# Altium PCB InfraredEmitter.PcbDoc
Units mil, origin at the board's own origin, x right, y up, seen from the top; angles counter-clockwise.
Board outline 1540 x 1315 mil, 2 copper layers (Top Layer, Bottom Layer), stack 21 mil thick; 22 components, 17 nets, 92 pads, 22 vias.
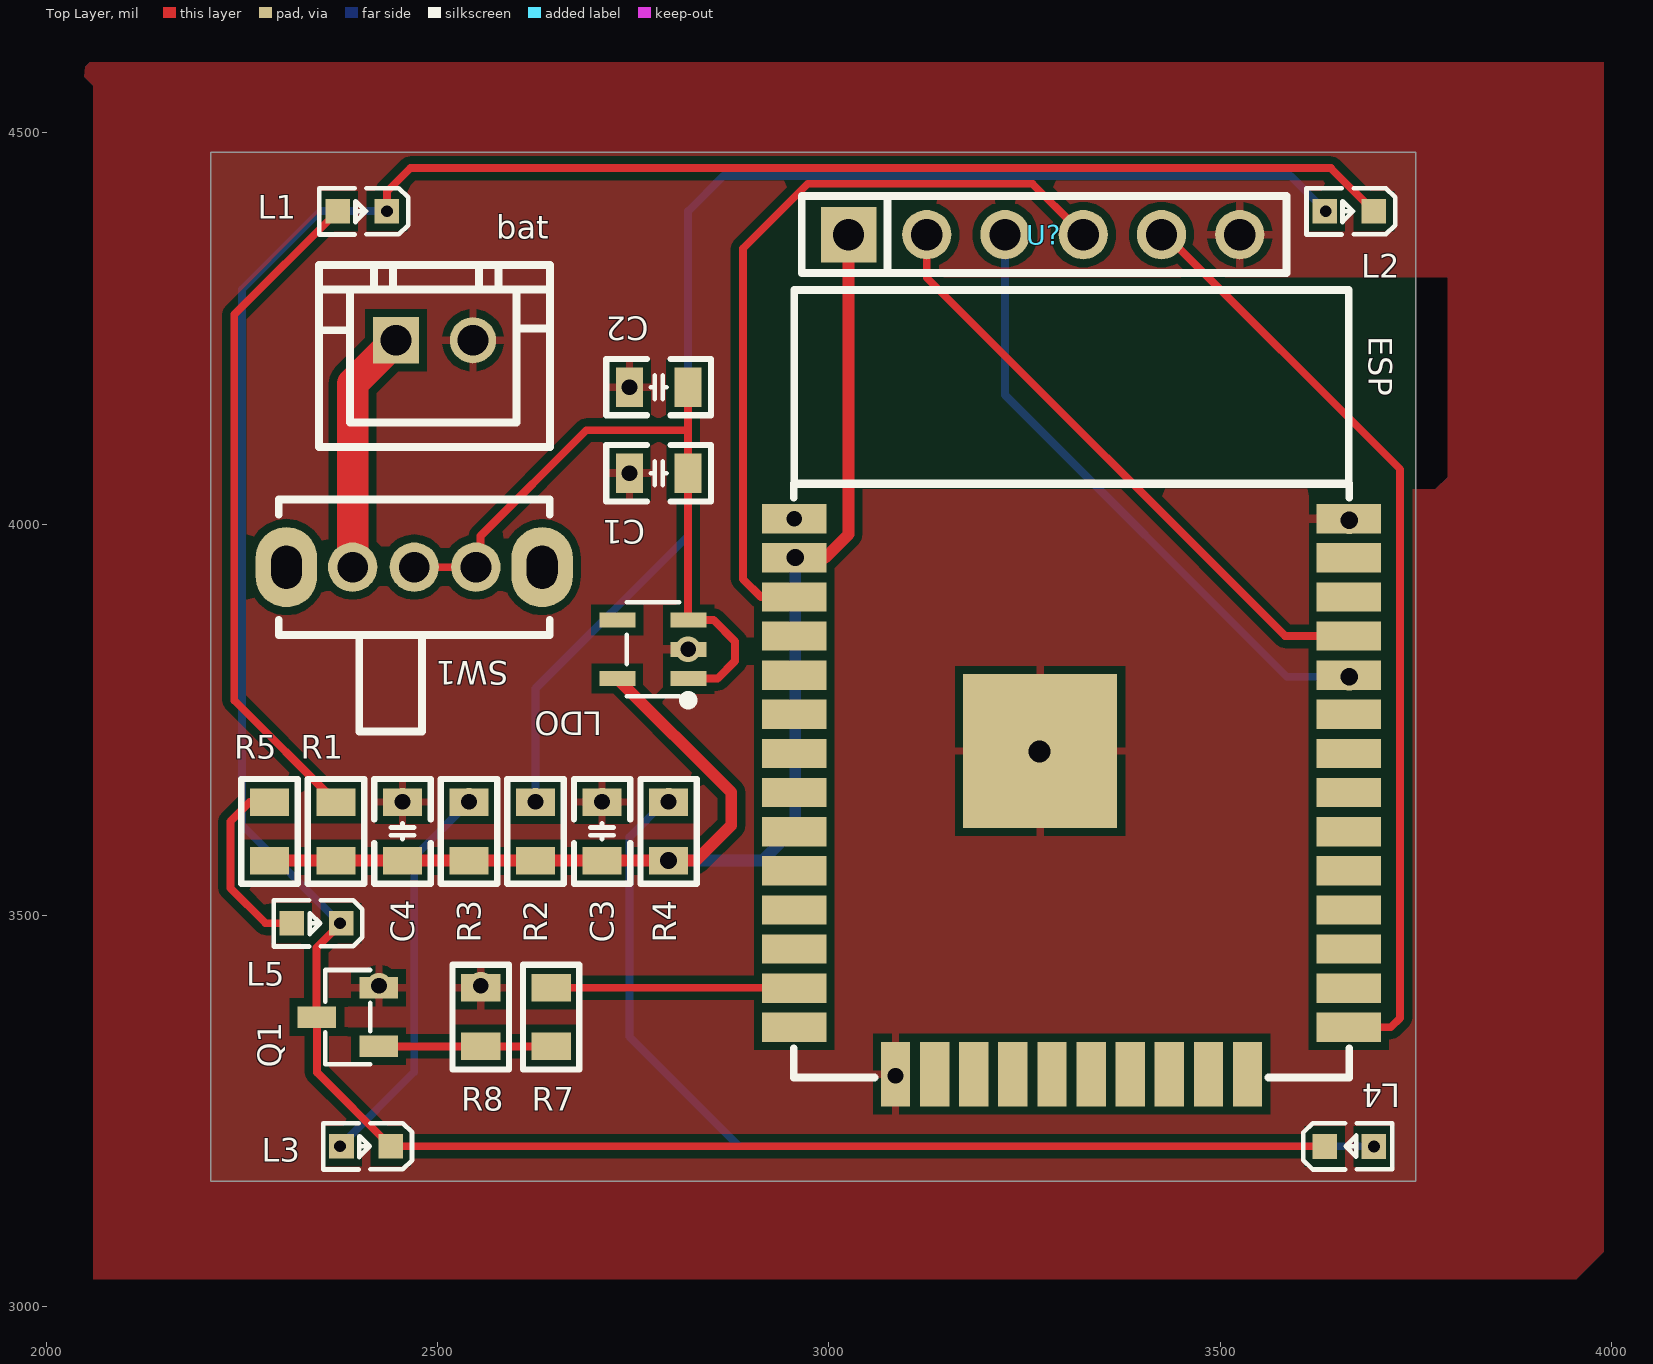
[diagram p0: Top Layer view]
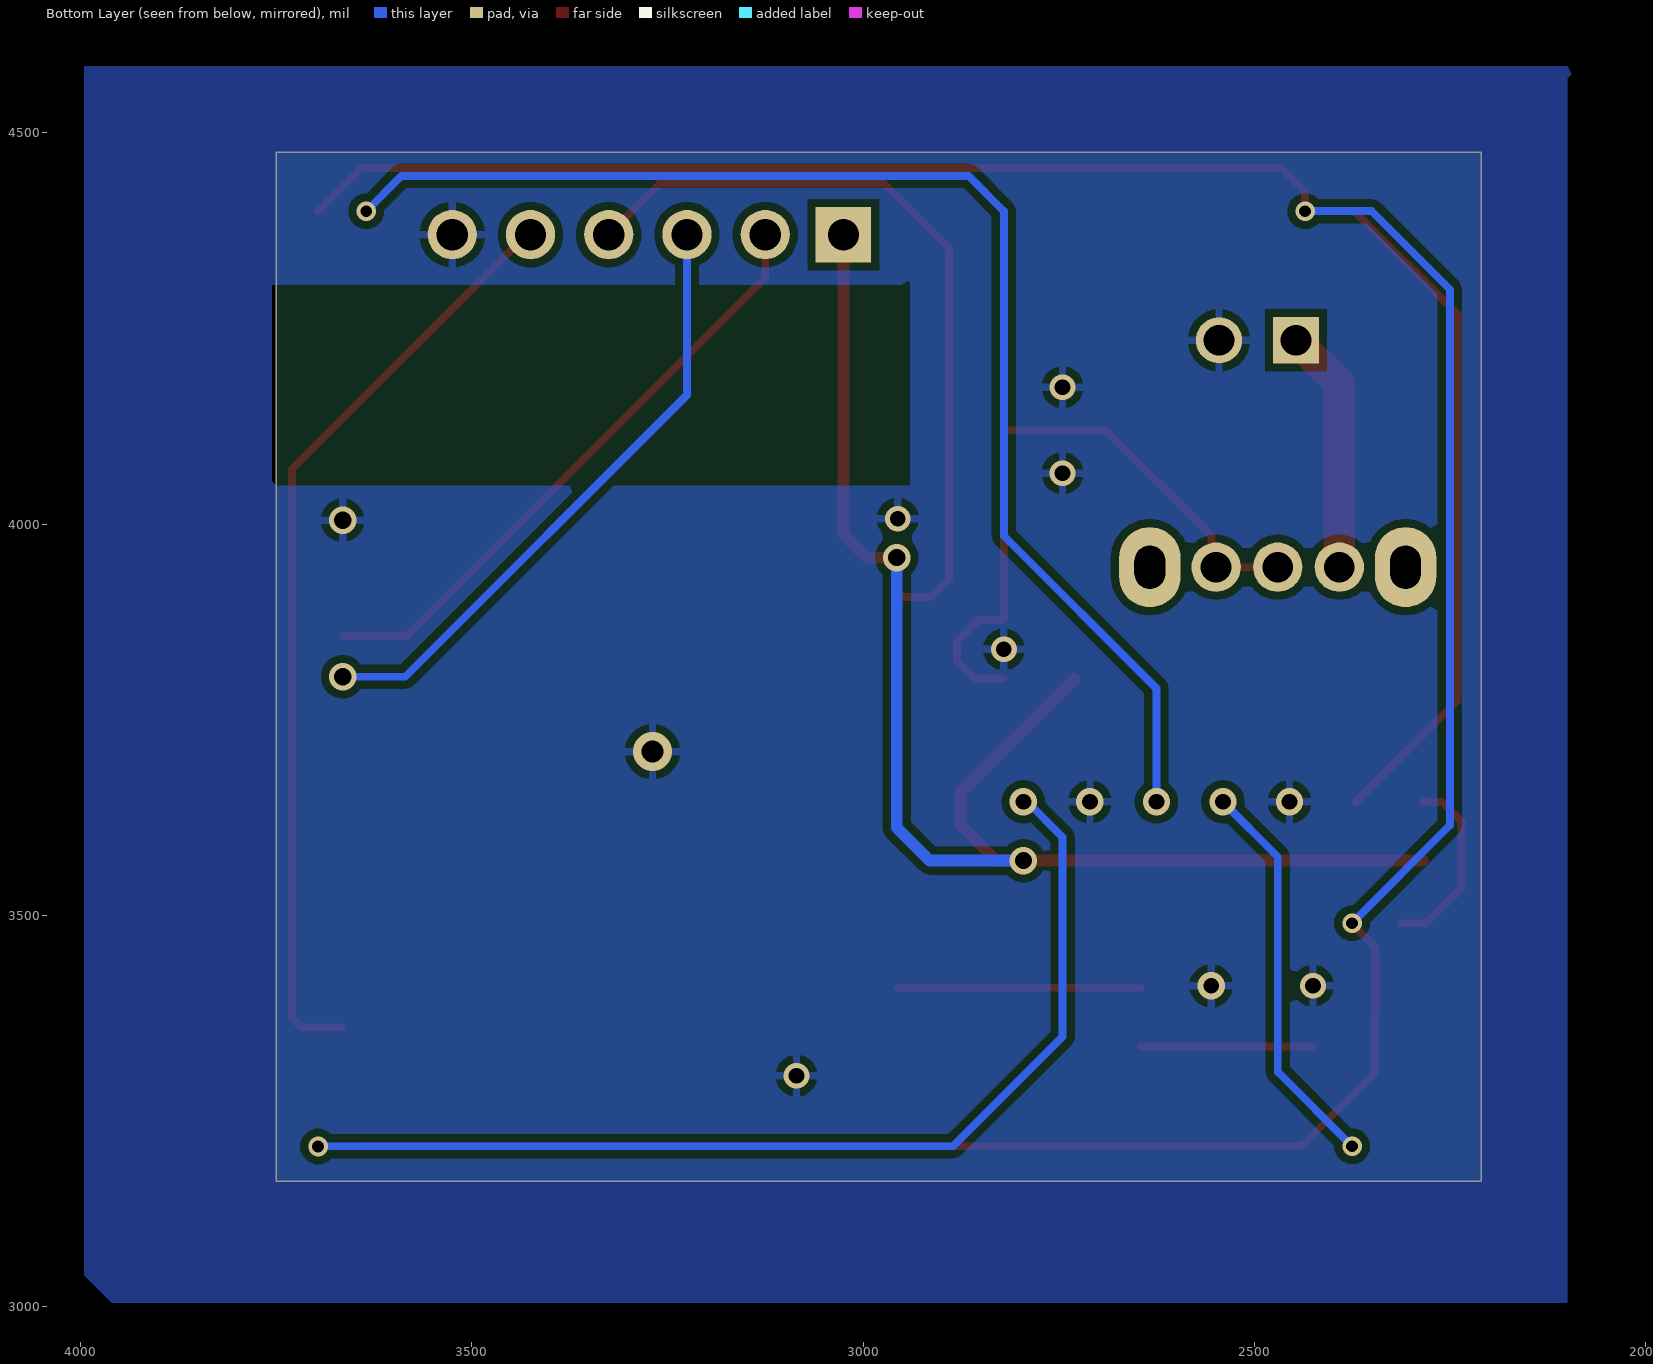
[diagram p1: Bottom Layer view, seen from below]
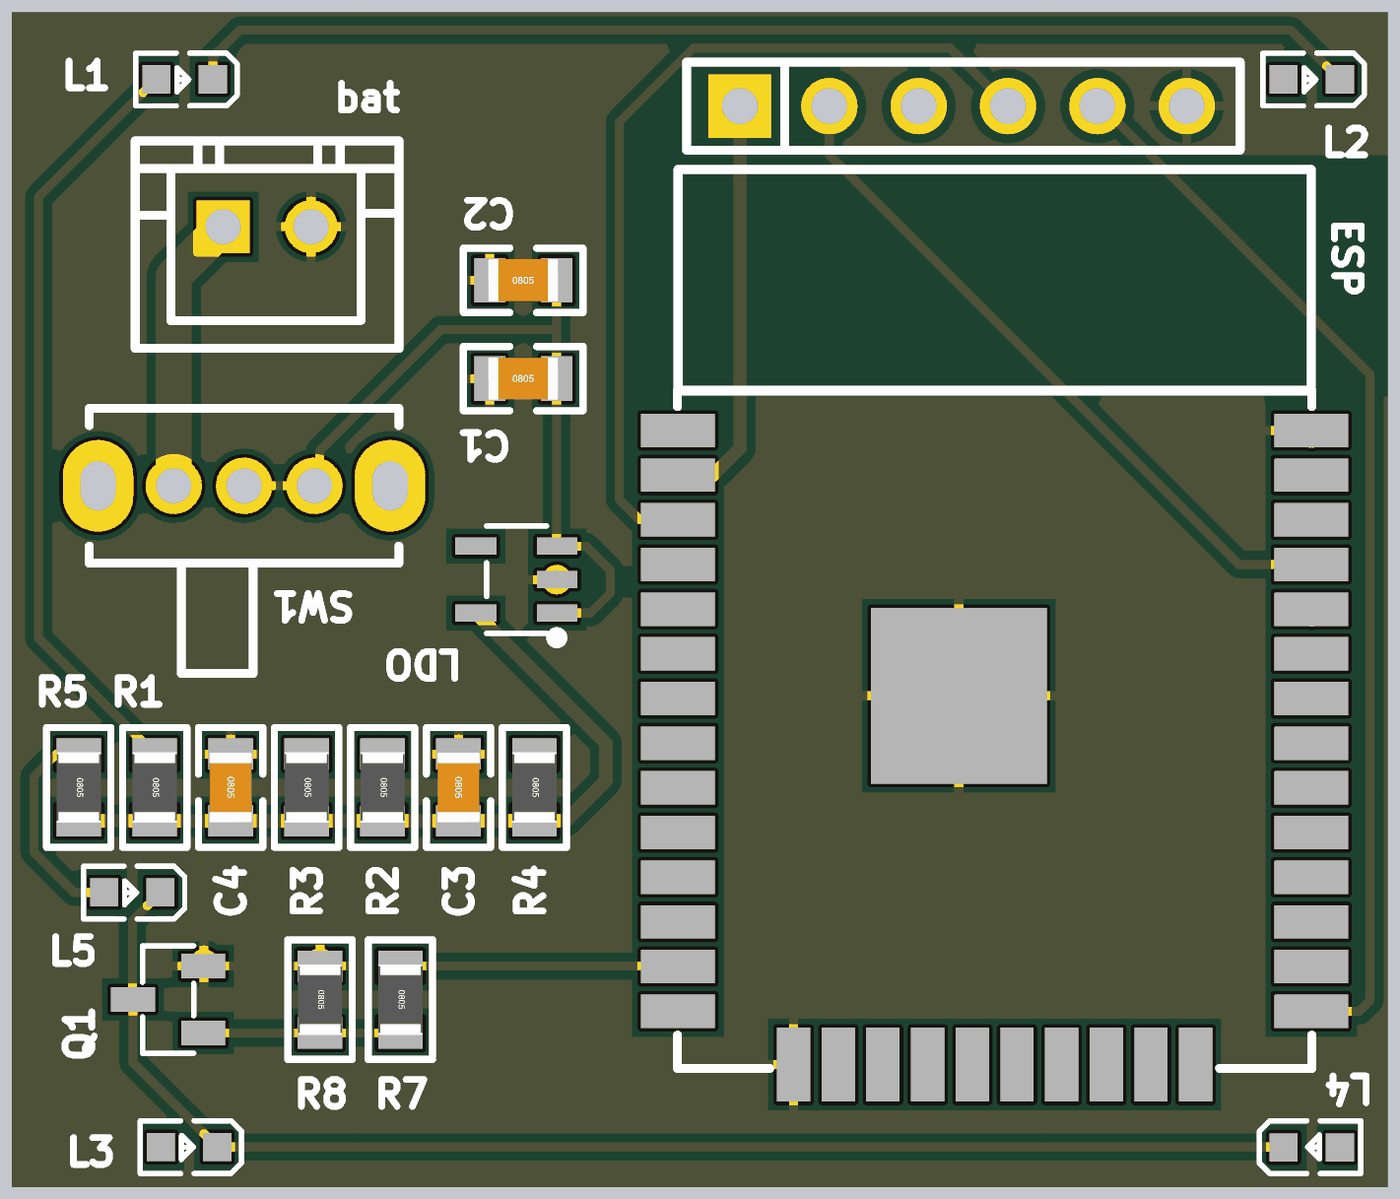
[diagram p2: 3D render of the assembled board from above, using the file's embedded part models]

## Layer stack, top to bottom
Top Solder: solder mask 0.4, Solder Resist, Dk 3.5
Top Layer: signal copper 1.4
Dielectric 2: prepreg 2.8, PP-006, Dk 4.1
Dielectric 1: dielectric 12.6, FR-4, Dk 4.8
Dielectric 3: prepreg 2.8, PP-006, Dk 4.1
Bottom Layer: signal copper 1.4
Bottom Solder: solder mask 0.4, Solder Resist, Dk 3.5

## Board outline
2210,3160 2210,4475 3750,4475 3750,3160

## Design rules (kind name [scope] priority, off if disabled: settings)
Clearance [All] p1: gap=10 ignorepadtopadclearanceinfootprint=FALSE
PolygonConnect [All] p1: connectstyle=Relief reliefconductorwidth=10 reliefentries=4 polygonreliefangle="90 Angle" airgapwidth=10
RoutingVias [All] p1: holewidth=28 width=50 viastyle="Through Hole" minholewidth=28 minwidth=50 maxholewidth=28 maxwidth=50
SolderMaskExpansion [All] p1: expansion=4 istentingtop=FALSE
SupplyNets "Schematic Supply Nets" [InNet('GND')] p1: voltage=0.000
Width [All] p1: maxlimit=50 minlimit=10 preferedwidth=10 minimp=50.000000 maximp=50.000000 favimp=50.000000
30 further rules are at their usual default settings.

## Components (designator, comment, footprint, x,y, rotation, side; value= is the part's Value field where it differs from the comment)
bat "HX-XH2.54-2PZZ" CONN-TH_2P-P2.50_HX-2.54MM-2P-ZZ-MS 2495.79,4235 r0 top
C1 "0.1u" "C 0805_L" 2782.4,4065 r0 top
C2 "0.1u" "C 0805_L" 2782.4,4175 r0 top
C3 "0.1u" "C 0805_L" 2710,3607.4 r270 top
C4 "0.1u" "C 0805_L" 2455,3607.4 r270 top
ESP "ESP32-WROOM-32D-N4" WIFIM-SMD_39P-L25.5-W18.0-P1.27-BL 3310.03,3652.05 r270 top
L1 "XYC-IRP0603AC-A2" LED0603-RD 2403.53,4400 r180 top (schematic designator Red1)
L2 "XYC-IRP0603AC-A2" LED0603-RD 3665,4400 r180 top (schematic designator Red2)
L3 "XYC-IRP0603AC-A2" LED0603-RD 2408.53,3205 r180 top (schematic designator Red3)
L4 "XYC-IRP0603AC-A2" LED0603-RD 3665,3204.58 r0 top (schematic designator Red4)
L5 "XYC-IRP0603AC-A2" LED0603-RD 2345,3490 r180 top (schematic designator Red5)
LDO "ME6211C33M5G-N" SOT-23-5_L3.0-W1.7-P0.95-LS2.8-BL 2775,3840 r90 top
Q1 "S8050" SOT-23-3_L2.9-W1.3-P1.90-LS2.4-BR 2385,3370 r0 top
R1 "100R" "R 0805_L" 2370,3607.4 r270 top
R2 "100R" "R 0805_L" 2625,3607.4 r270 top
R3 "100R" "R 0805_L" 2540,3607.4 r270 top
R4 "100R" "R 0805_L" 2795,3607.4 r270 top
R5 "100R" "R 0805_L" 2285,3607.4 r270 top
R7 "4.7k" "R 0805_L" 2645,3370 r270 top
R8 "10K" "R 0805_L" 2555,3370 r270 top
SW1 "SK12D07VG3" SW-TH_SK12D07VG3 2470,3945 r0 top
U? "Comment" HDR-TH_6P-P2.54-V-F 3275,4370 r0 top

## Footprints (in the part's own frame and the unit in brackets; to place one, negate y for a bottom-side part, rotate by r counter-clockwise, add the part's x,y. Pads: shape width x height; smd on the part's side, far side on the other; paste and mask are expansions set on the pad)
"C 0805_L" [mil] "无极性贴片电容                                        淘宝ID:黄晶宝石"
  rect 35x50 smd: 1(-37.4,0) 2(37.4,0)
  silkscreen extent -67,-36 67,36, body extent -39,-24 39,24, height 20
CONN-TH_2P-P2.50_HX-2.54MM-2P-ZZ-MS [mm]
  rect 1.5x1.5 hole 1: 1(-1.25,0)
  round 1.5 hole 1: 2(1.25,0)
  silkscreen extent -3.75,-3.46 3.75,2.44
HDR-TH_6P-P2.54-V-F [mm]
  rect 1.8x1.8 hole 1.02 paste-2539.97 mask+0: 1(-6.35,0)
  round 1.6 hole 1.02 paste-2539.97 mask+0: 2(-3.81,0) 3(-1.27,0) 4(1.27,0) 5(3.81,0) 6(6.35,0)
  silkscreen extent -7.87,-1.25 7.87,1.25
LED0603-RD [mm]
  rect 0.8x0.8 smd: 1(-0.799,0) 2(0.799,0)
  silkscreen extent -1.49,-0.75 1.39,0.76
"R 0805_L" [mil] "1/8W贴片电阻"
  rect 35x50 smd: 1(-37.4,0) 2(37.4,0)
  silkscreen extent -67,-36 67,36, body extent -39,-25 39,25, height 20
SOT-23-3_L2.9-W1.3-P1.90-LS2.4-BR [mm]
  rect 1.25x0.7 smd: 1(1,-0.95) 2(1,0.95) 3(-1,0)
  silkscreen extent -0.73,-1.53 0.73,1.53
SOT-23-5_L3.0-W1.7-P0.95-LS2.8-BL [mm]
  rect 0.49x1.157 smd: 1(-0.95,-1.154) 2(0,-1.154) 3(0.95,-1.154)
  rect 0.49x1.175 smd: 4(0.95,1.154) 5(-0.95,1.154)
  silkscreen extent -1.8,-1.29 1.53,0.85
SW-TH_SK12D07VG3 [mm]
  round 1.6 hole 1: 1(-2,0) 2(0,0) 3(2,0)
  oval 2x2.6 hole 1 slot 1.4 at 90 deg: 4(4.15,0) 5(-4.15,0)
  silkscreen extent -4.4,-5.33 4.4,2.2
WIFIM-SMD_39P-L25.5-W18.0-P1.27-BL [mm]
  rect 0.95x2.1 smd: 1(-9.015,-9) 2(-7.745,-9) 3(-6.475,-9) 4(-5.205,-9) 5(-3.935,-9) 6(-2.665,-9) 7(-1.395,-9) 8(-0.125,-9) 9(1.145,-9) 10(2.415,-9) 11(3.685,-9) 12(4.955,-9) 13(6.225,-9) 14(7.495,-9) 25(7.495,9) 26(6.225,9) 27(4.955,9) 28(3.685,9) 29(2.415,9) 30(1.145,9) 31(-0.125,9) 32(-1.395,9) 33(-2.665,9) 34(-3.935,9) 35(-5.205,9) 36(-6.475,9) 37(-7.745,9) 38(-9.015,9)
  rect 2.1x0.95 smd: 15(9.015,-5.715) 16(9.015,-4.445) 17(9.015,-3.175) 18(9.015,-1.905) 19(9.015,-0.635) 20(9.015,0.635) 21(9.015,1.905) 22(9.015,3.175) 23(9.015,4.445) 24(9.015,5.715)
  rect 5x5 smd: 39(-1.472,-1.017)
  silkscreen extent -16.44,-9.02 9.12,9.02

## Part data
bat: Color=白色, Current Rating=3A, Flame Retardant Rating=UL94V-0, JLCPCB Part Class="Extended Part", LCSC Part Name="1x2P 间距:2.5mm 直插 系列:XH", Manufacturer=hanxia(韩下), Operating Temperature=-25℃~+85℃, Voltage Rating=250V, Add into BOM=yes, Contact Material=黄铜, Contact Plating=锡, Convert to PCB=yes, Datasheet=https://item.szlcsc.com/datasheet/HX-XH2.54-2PZZ/44326932.html, Device=HX-XH2.54-2PZZ, Manufacturer Part=HX-XH2.54-2PZZ, Mounting Type=直插, Number of Pins=2P, Number of PINs Per Row=2, Number of Rows=1, Pins Structure=1x2P, Pitch=2.54mm, Plastic Material=PA66, Reference Series=XH, Row Spacing=-, Supplier=LCSC, Supplier Footprint=插件,P=2.5mm, Supplier Part=C42391660, Symbol=HX-XH2.54-2PZZ
C1 C2 C3 C4: library part C, "贴片电容", BOM名称=无极性贴片电容, 唯一出售店铺网址=https://shop463601444.taobao.com, 淘宝ID="封装库来自淘宝 ID：黄晶宝石", 联系售后，技术支持=https://shop463601444.taobao.com
ESP: JLCPCB Part Class="Extended Part", LCSC Part Name="通用型Wi-Fi+BT+BLE MCU模组", Manufacturer=ESPRESSIF(乐鑫), Add into BOM=yes, Convert to PCB=yes, Datasheet=https://atta.szlcsc.com/upload/public/pdf/source/20191225/C473012_1E74417EE995DBCF17C94BD318A37DAB.pdf, Device=ESP32-WROOM-32D-N4, Manufacturer Part=ESP32-WROOM-32D-N4, Supplier=LCSC, Supplier Footprint=SMD,18x25.5mm, Supplier Part=C473012, Symbol=ESP32-WROOM-32D
L1 L2 L3 L4 L5: Current - DC Forward(If)=50mA, JLCPCB Part Class="Extended Part", LCSC Part Name=0603贴片850nm红外发射管, Manufacturer=NEWOPTO(鑫永诚光电), Operating Temperature=-30℃~+85℃, Pd - Power Dissipation=80mW, Voltage - DC Reverse(Vr)=5V, Voltage - Forward(Vf)=1.3V~1.6V, Add into BOM=yes, Convert to PCB=yes, Datasheet=https://item.szlcsc.com/datasheet/XYC-IRP0603AC-A2/7022073.html, Device=XYC-IRP0603AC-A2, Manufacturer Part=XYC-IRP0603AC-A2, Radiant Intensity=2.25mW/sr, Supplier=LCSC, Supplier Footprint=0603, Supplier Part=C6081304, Symbol=XYC-IRP0603AC-A2, Viewing Angle=140°, Wavelength=850nm
LDO: JLCPCB Part Class="Extended Part", LCSC Part Name="输入6V 输出3.3V 500mA", Manufacturer=MICRONE(南京微盟), Operating Temperature=-40℃~+150℃, Output Current=500mA, Output Voltage=3.3V, Power Supply Rejection Ratio (PSRR)=70dB@(1kHz), standby current=60uA, Voltage - Supply=6V, Voltage Dropout=120mV@(100mA), Add into BOM=yes, Convert to PCB=yes, Datasheet=https://atta.szlcsc.com/upload/public/pdf/source/20170918/C82942_1505727073070976520.pdf, Device=ME6211C33M5G-N, Features=过流保护；带使能；短路保护, Manufacturer Part=ME6211C33M5G-N, Noise=50uVrms, Number of Outputs=1, Output Configuration=正极, Output Type=固定, Supplier=LCSC, Supplier Footprint=SOT-23-5, Supplier Part=C82942, Symbol=ME6211C33M5G-N
Q1: library part S8050_C908252, Collector - Emitter Voltage VCEO=25V, Current - Collector Cutoff=100nA, Current - Collector(Ic)=500mA, JLCPCB Part Class="Extended Part", LCSC Part Name="NPN 电流:500mA 电压:25V", Manufacturer=FUXINSEMI(富芯森美), Operating Temperature=-, Pd - Power Dissipation=300mW, Transition frequency(fT)=150MHz, Add into BOM=yes, Convert to PCB=yes, Datasheet=https://item.szlcsc.com/datasheet/S8050/974494.html, Device=S8050_C908252, Manufacturer Part=S8050, Supplier=LCSC, Supplier Footprint=SOT-23, Supplier Part=C908252, Symbol=S8050_C908252, Type=NPN, Vce Saturation(VCE(sat))=600mV
R1 R2 R3 R4 R5 R7 R8: library part R, "贴片电阻", BOM名称=贴片电阻, 封装库来自淘宝卖家 ID：黄晶宝石=其他店铺购入均为盗版，不享受售后技术支持服务，请立即申请退款, 版权归属="来自淘宝 ID：黄晶宝石", 联系售后=https://shop463601444.taobao.com
SW1: library part SK12D07VG3_1, Actuator Color=-, Current Rating=500mA, JLCPCB Part Class="Extended Part", LCSC Part Name=两档位卧式拨动开关,柄长3MM, Manufacturer="SHOU HAN(首韩)", Operating Temperature=-10℃~+50℃, Voltage Rating=50V, Actuator Style=-, Add into BOM=yes, Circuit=单刀双掷, Convert to PCB=yes, Datasheet=https://item.szlcsc.com/datasheet/SK12D07VG3/427904.html, Device=SK12D07VG3, Length=8.7mm, Life=5千次, Manufacturer Part=SK12D07VG3, Mounting Type=-, Supplier=LCSC, Supplier Footprint=插件,8.7x4.4mm, Supplier Part=C431547, Switch Height=4.7mm, Symbol=SK12D07VG3_C431547, Termination Style=PC引脚, Width=4.4mm

## Via types
v1: diameter 33, hole 20, Top Layer to Bottom Layer, 6 vias
v2: diameter 35, hole 20, Top Layer to Bottom Layer, 6 vias
v3: diameter 25, hole 15, Top Layer to Bottom Layer, 5 vias
v4: diameter 35, hole 22, Top Layer to Bottom Layer, 4 vias
v5: diameter 50, hole 28, Top Layer to Bottom Layer, 1 vias

## Nets (pads, with @x,y where several pads share a name; then routed paths per layer and width w, separated by ;. In a path a pad name is that pad's centre, name@x,y a point inside that pad or via, vN(x,y) a via of type N, cw(c..) or ccw(c..) an arc to the next point about the centre after c; other vN are vias at no path point)
3.3V: C3.2 C4.2 ESP.2 LDO.5 R1.2 R2.2 R3.2 R4.2 R5.2 U?.1 | length 1853
  Top Layer w15: R5.2 C4.2 R3.2 R2.2 C3.2 v4(2795,3570) 2830,3570 2875,3615 2875,3657.18 LDO.5 ; ESP.2 2995.01,3956.97 3025,3986.96 U?.1 ; U?.1@3020,4380 U?.1@3025,4375
  Bottom Layer w15: v4(2795,3570) 2915,3570 2957.02,3612.02 v4(2957.02,3957.25)
bat+: bat.1 SW1.1 | length 312.9
  Top Layer w40: SW1.1 2391.26,4179.69 bat.1
BOOT: ESP.25 U?.5 | length 1199.5
  Top Layer w10: U?.5@3427.5,4372.5 3730,4070 3730,3368.94 3718.03,3356.97 ESP.25
EN: ESP.3 U?.4 | length 984.5
  Top Layer w10: ESP.3 2913.03,3906.97 2890,3930 2890,4352.08 2972.92,4435 3260,4435 3315,4380 U?.4@3320,4380
GND: bat.2 C1.1 C2.1 C3.1 C4.1 ESP.1 ESP.15 ESP.38 ESP.39 LDO.2 Q1.2 R8.1 U?.6
  other v1: 3085,3295 2425,3410 2820,3840 2955.71,4006.97 2745,4065 2745,4175
  other v2: 2555,3410 2455,3645 2710,3645
  other v4: 3665,4005
  other v5: 3269.08,3709.3
IO4: ESP.26
IO14: ESP.13 R7.1 | length 310.9
  Top Layer w10: R7.1 2955.28,3407.4 ESP.13
NetC1_2: C1.2 C2.2 LDO.1 LDO.3 SW1.2 SW1.3 | length 904.7
  Top Layer w10: SW1.2 SW1.3 2554.75,3951.01 2554.75,3984.75 2690,4120 2819.8,4120 ; C2.2 2819.8,4120 ; LDO.1 2857.6,3802.6 2880,3825 2880,3850 2852.6,3877.4 LDO.3 2819.8,3878.02 C1.2 2819.8,4120
NetQ1_1: Q1.1 R7.2 R8.2 | length 220.6
  Top Layer w10: Q1.1 R8.2 R7.2
NetQ1_3: L1.1 L2.1 L3.1 L4.1 L5.1 Q1.3 | length 3941.8
  Top Layer w10: L5.1 v3(2375,3490) 2375.01,3488.53 2345,3458.53 2345,3370.63 Q1.3 2345.63,3299.38 L3.1 3633.09,3205.01 L4.1 ; v3(2435,4400.01) 2435,4425 2465,4455 3641.48,4455 L2.1
  Bottom Layer w10: v3(2375,3490) 2250,3615 2250,4300 2350.01,4400.01 v3(2435,4400.01)
NetR1_1: L1.2 R1.1 | length 863.7
  Top Layer w10: R1.1 2240,3774.8 2240,4267.94 L1.2
NetR2_1: L2.2 R2.1 | length 1688.1
  Bottom Layer w10: v2(2625,3645) 2625,3790 2820,3985 2820,4400 2865,4445 3590,4445 v3(3635,4400)
NetR3_1: L3.2 R3.1 | length 508.1
  Bottom Layer w10: v3(2375,3205) 2470,3300 2470,3574.8 v2@2540,3644.8
  other v2: 2540,3645
NetR4_1: L4.2 R4.1 | length 1333.3
  Bottom Layer w10: v2(2795,3645) 2790,3645 2745,3600 2745,3345 2885,3205 3696.06,3205 v3(3696.47,3204.58)
NetR5_1: L5.2 R5.1 | length 242.4
  Top Layer w10: R5.1 2259.8,3644.8 2235,3620 2235,3535 2280.01,3489.99 L5.2
RX: ESP.35 U?.2 | length 784.1
  Top Layer w10: U?.2 3125,4315 3583.03,3856.97 ESP.35
TX: ESP.34 U?.3 | length 794.1
  Bottom Layer w10: U?.3 3225,4165 3585,3805 v4(3665,3805)
pads on no net: ESP.4 ESP.5 ESP.6 ESP.7 ESP.8 ESP.9 ESP.10 ESP.11 ESP.12 ESP.14 ESP.16 ESP.17 ESP.18 ESP.19 ESP.20 ESP.21 ESP.22 ESP.23 ESP.24 ESP.27 ESP.28 ESP.29 ESP.30 ESP.31 ESP.32 ESP.33 ESP.36 ESP.37 LDO.4 SW1.4 SW1.5

## Polygon pours and split planes (outlines as drawn)
GND on Top Layer "GND_L01_P000" (solid, remove dead copper, pour order 0): 2035,4585 2060,4560 2060,3035 3955,3035 3990,3070 3990,4590 2055,4590 2045,4580
GND on Bottom Layer "GND_L02_P001" (solid, remove dead copper, pour order 1): 2080,4590 2100,4570 2100,3005 3960,3005 3995,3040 3995,4585 2090,4585

## Other copper
Top Layer:
  pour cut-out: 2920,4315 2925,4310 2925,4045 3775,4045 3790,4060 3790,4315
Bottom Layer:
  pour cut-out: 2940,4310 2940,4050 3750,4050 3755,4055 3755,4305 2950,4305 2945,4310

## Silkscreen, mask and mechanical layers (free items; w line width, h text height)
Mechanical 1:
  lines w10: 2206.56,3052.47 2206.69,3032.47 ; 2266.5,3062.86 2206.63,3042.47 ; 2266.76,3022.86 2206.63,3042.47 ; 2588.26,3044.94 2206.63,3042.47 ; 3370,3050 3751.63,3052.47 ; 3691.5,3072.08 3751.63,3052.47 ; 3691.76,3032.08 3751.63,3052.47 ; 3751.56,3062.47 3751.69,3042.47 ; 3770,3221.58 3790,3161.58 ; 3770,4416.58 3790,4476.58 ; 3780,3161.58 3800,3161.58 ; 3780,4476.58 3800,4476.58 ; 3790,3548.16 3790,3161.58 ; 3790,4090 3790,4476.58 ; 3810,3221.58 3790,3161.58 ; 3810,4416.58 3790,4476.58 ; 2210,3160 3750,3160 3750,4475 2210,4475 2210,3160
  text "1315 (mil)" at 3825.99,3558.16 h60 r90
  text "1545.032 (mil)" at 2598.49,3009.02 h60 r0.37